# Allegro board DOEON_PCBv4.brd
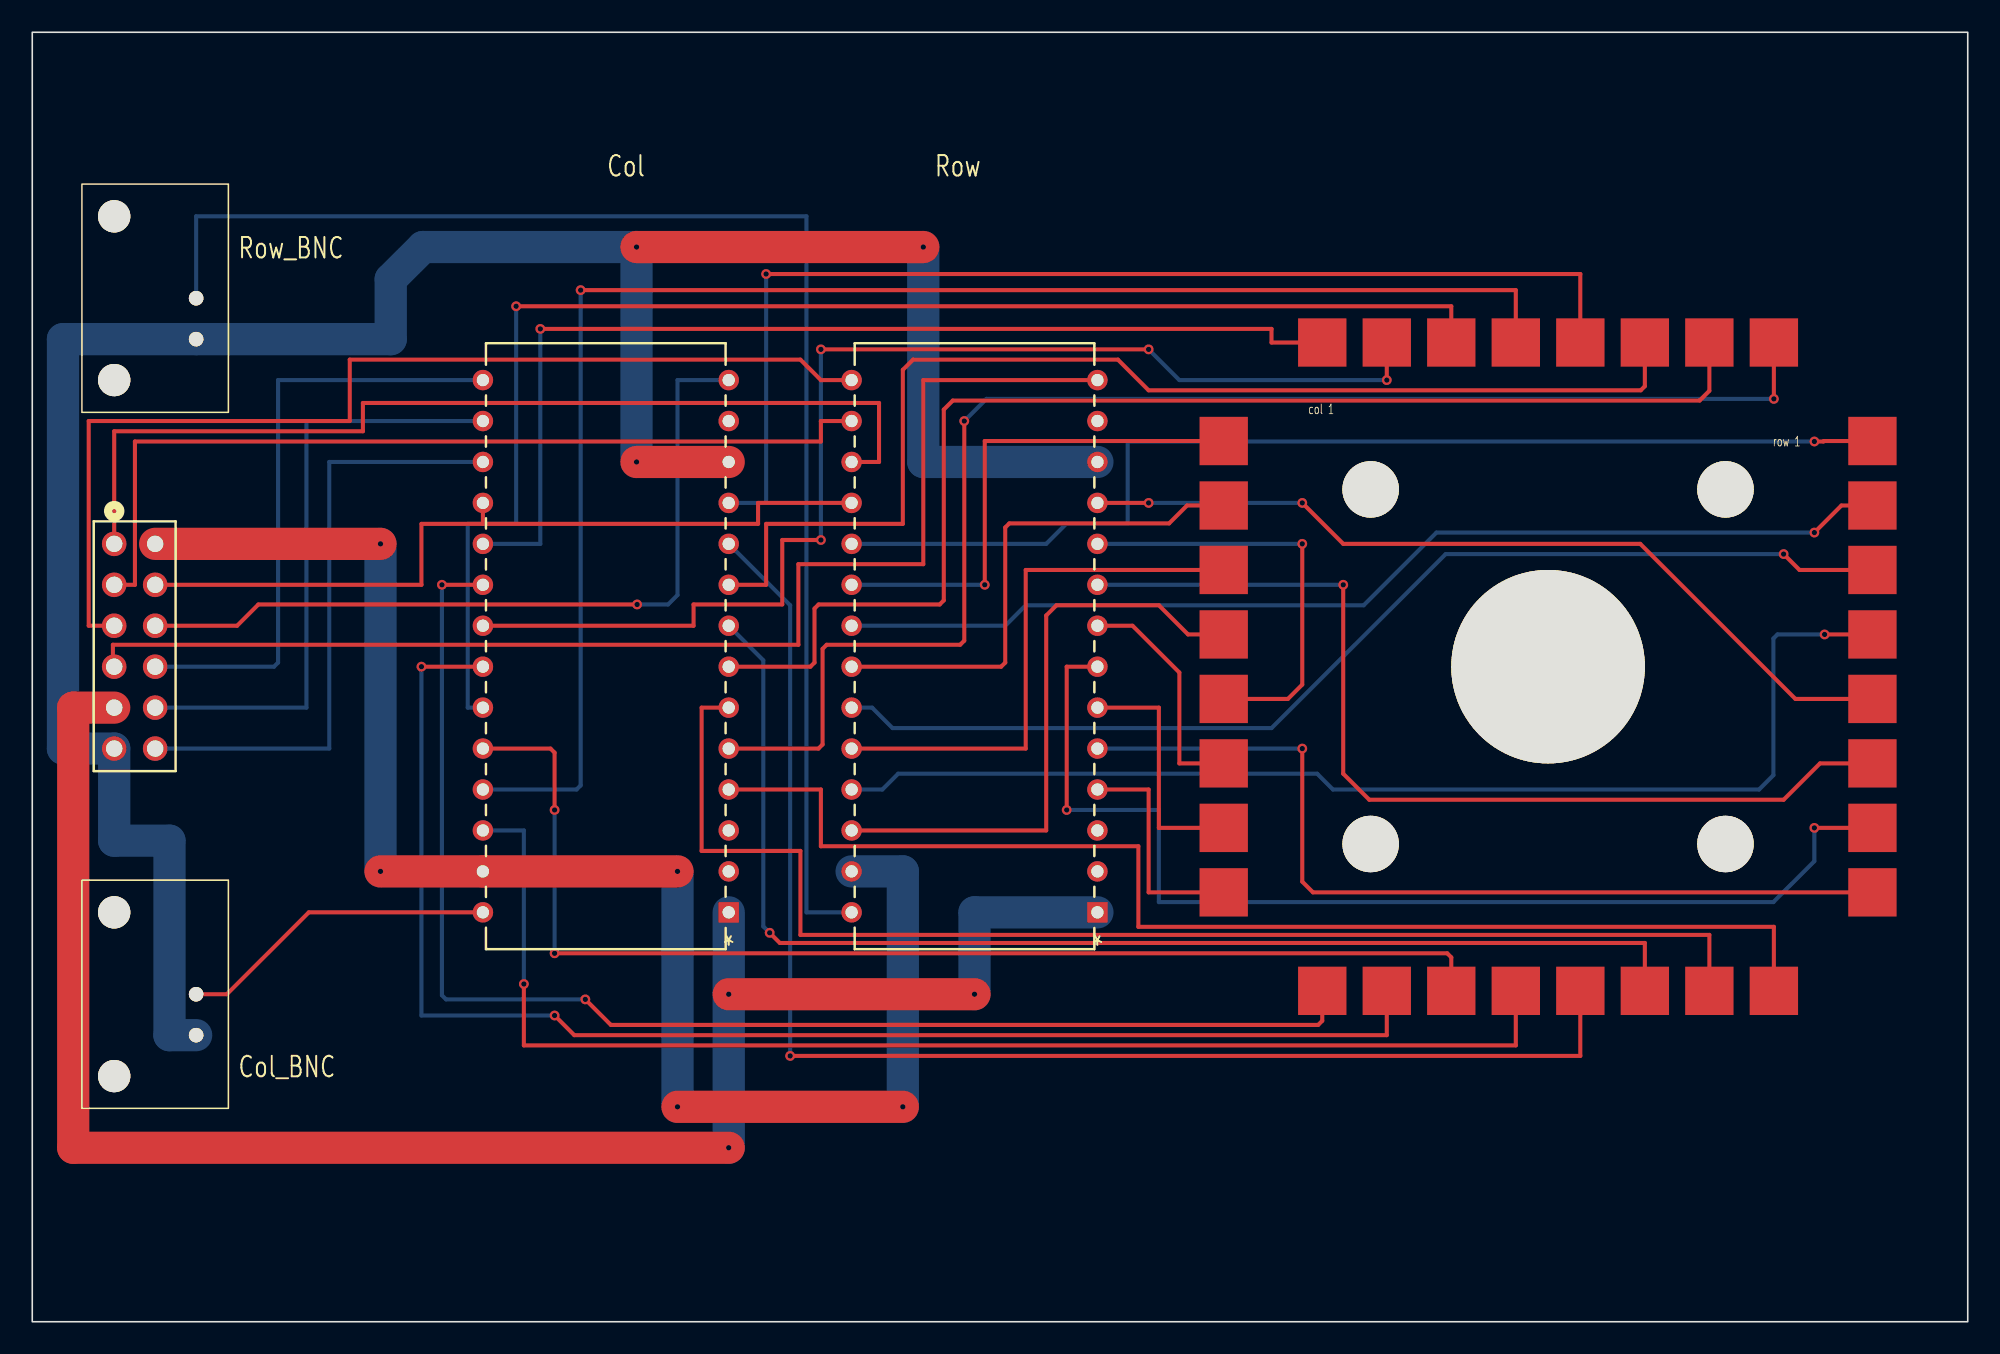
[diagram p0: board, top side]
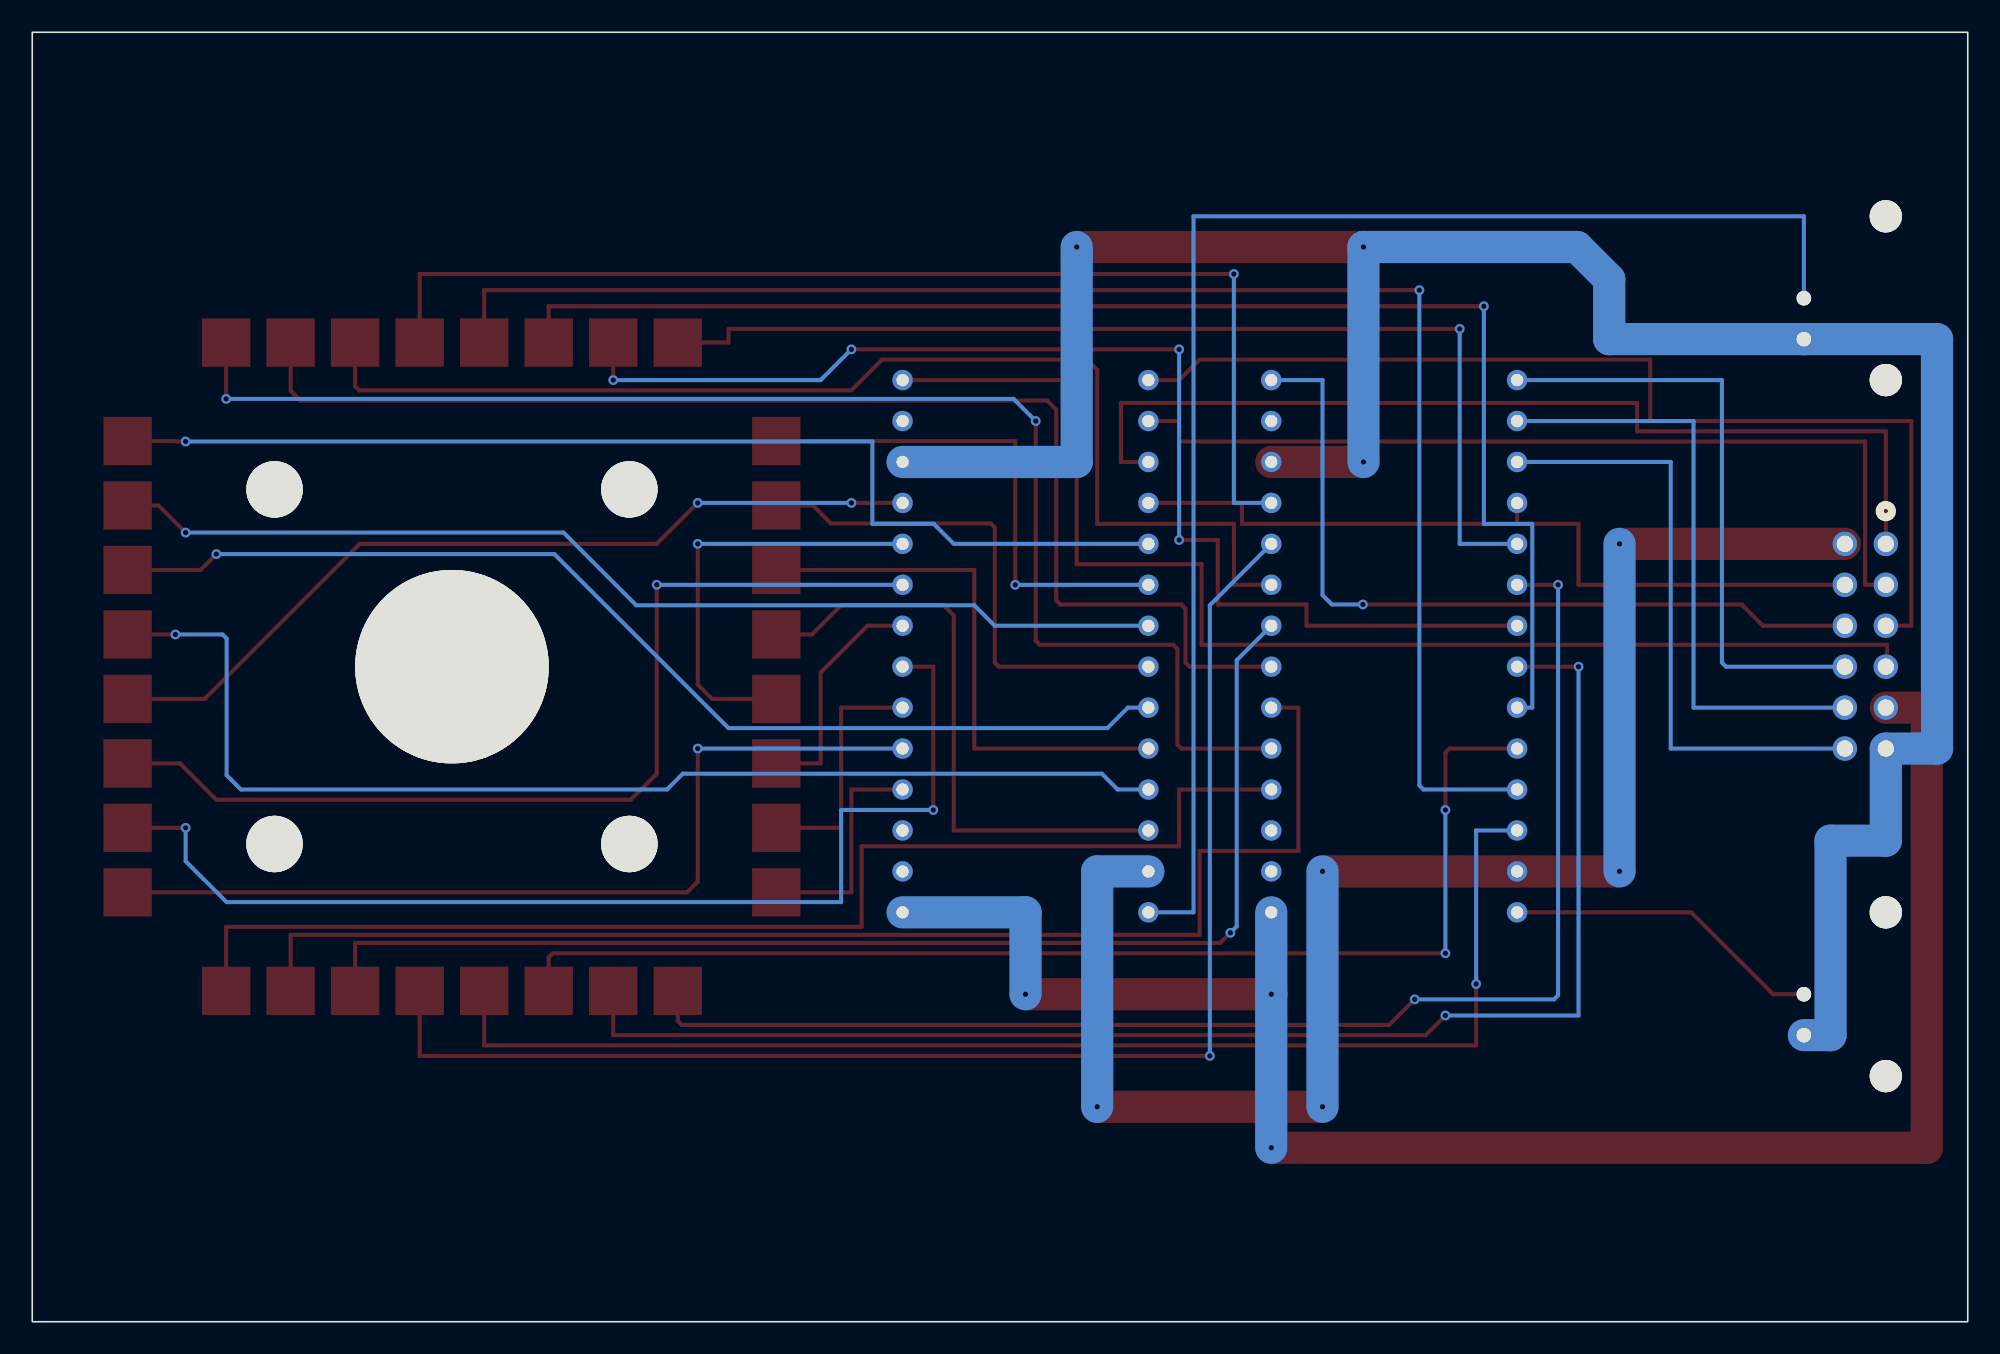
[diagram p1: board, bottom side, seen from below]

Outline 120 x 80 mm; copper layers: TOP, BOTTOM. Coordinates in mm from the lower left corner of the outline.
Outline path: rectangle 0,0 120,80

## Design rules (mm)
constraint set DEFAULT: min track width 0.254, pair gap 0.3

## Placement (name value [footprint] x y rotation side)
J1  67997-212HLF  [12PINS]  5.08 48.26 270 top
NOREF  -  []  0 80 0 top
NOREF#2  -  []  120 0 90 top
SAMPLE1  sample_holder  [SAMPLE_MOUNT]  93.98 40.64 0 top
U1  MAX396EPI  [21-0044B_28]  66.04 25.4 180 top
U2  MAX396EPI  [21-0044B_28]  43.18 25.4 180 top
VBI1  VBI211  [BNC_YB]  5.08 68.58 90 top
VBI2  VBI211  [BNC_YB]  5.08 25.4 90 top

## Library data of the parts
J1 = 67997-212HLF: User Part Number: PN; Tolerance: TOL
SAMPLE1 = sample_holder
U1 U2 = MAX396EPI: User Part Number: PN; Tolerance: TOL
VBI1 VBI2 = VBI211

## Footprints (pads in the part's own frame, mm; a bottom-side part is the same pattern mirrored in y, then rotated)
12PINS
  round 1.524 hole 1.016: A1(0,0) A2(2.54,0) A3(5.08,0) A4(7.62,0) A5(10.16,0) A6(12.7,0) B1(0,2.54) B2(2.54,2.54) B3(5.08,2.54) B4(7.62,2.54) B5(10.16,2.54) B6(12.7,2.54)
21-0044B_28
  rect 1.27x1.27 hole 0.762: 1(0,0)
  round 1.27 hole 0.762: 2(0,-2.54) 3(0,-5.08) 4(0,-7.62) 5(0,-10.16) 6(0,-12.7) 7(0,-15.24) 8(0,-17.78) 9(0,-20.32) 10(0,-22.86) 11(0,-25.4) 12(0,-27.94) 13(0,-30.48) 14(0,-33.02) 15(15.24,-33.02) 16(15.24,-30.48) 17(15.24,-27.94) 18(15.24,-25.4) 19(15.24,-22.86) 20(15.24,-20.32) 21(15.24,-17.78) 22(15.24,-15.24) 23(15.24,-12.7) 24(15.24,-10.16) 25(15.24,-7.62) 26(15.24,-5.08) 27(15.24,-2.54) 28(15.24,0)
BNC_YB
  round 0.9 hole 0.9: 1(-7.62,-5.08) 2(-5.08,-5.08)
  round 2 hole 2: 3(-10.16,0) 4(0,0)
SAMPLE_MOUNT
  rect 3x3 smd: 1(20.11,14) 2(-20.11,14) 3(20.11,10) 4(-20.11,10) 5(20.11,6) 6(-20.11,6) 7(20.11,2) 8(-20.11,2) 9(20.11,-2) 10(-20.11,-2) 11(20.11,-6) 12(-20.11,-6) 13(20.11,-10) 14(-20.11,-10) 15(20.11,-14) 16(-20.11,-14) 17(-14,20.11) 18(-14,-20.11) 19(-10,20.11) 20(-10,-20.11) 21(-6,20.11) 22(-6,-20.11) 23(-2,20.11) 24(-2,-20.11) 25(2,20.11) 26(2,-20.11) 27(6,20.11) 28(6,-20.11) 29(10,20.11) 30(10,-20.11) 31(14,20.11) 32(14,-20.11)
  round 3.5 hole 3.5: 33(-11,11) 34(11,11) 35(-11,-11) 36(11,-11)
  round 12 hole 12: 37(0,0)

## Nets
GND: J1.A6 U1.12 U2.12 VBI1.1 VBI2.1
COL_1: SAMPLE1.17 U2.19
COL_2: SAMPLE1.18 U2.20
COL_3: SAMPLE1.19 U2.21
COL_4: SAMPLE1.20 U2.22
COL_5: SAMPLE1.21 U2.23
COL_6: SAMPLE1.22 U2.24
COL_7: SAMPLE1.23 U2.25
COL_8: SAMPLE1.24 U2.26
COL_9: SAMPLE1.25 U2.11
COL_10: SAMPLE1.26 U2.10
COL_11: SAMPLE1.27 U2.9
COL_12: SAMPLE1.28 U2.8
COL_13: SAMPLE1.29 U2.7
COL_14: SAMPLE1.30 U2.6
COL_15: SAMPLE1.31 U2.5
COL_16: SAMPLE1.32 U2.4
COL_A0: J1.B6 U2.17
COL_A1: J1.B5 U2.16
COL_A2: J1.B4 U2.15
COL_A3: J1.B3 U2.14
EN: J1.B2 U1.18 U2.18
PULSE_IN: U1.28 VBI1.2(I_O)
PULSE_OUT: U2.28 VBI2.2(I_O)
ROW_1: SAMPLE1.1 U1.19
ROW_2: SAMPLE1.2 U1.20
ROW_3: SAMPLE1.3 U1.21
ROW_4: SAMPLE1.4 U1.22
ROW_5: SAMPLE1.5 U1.23
ROW_6: SAMPLE1.6 U1.24
ROW_7: SAMPLE1.7 U1.25
ROW_8: SAMPLE1.8 U1.26
ROW_9: SAMPLE1.9 U1.11
ROW_10: SAMPLE1.10 U1.10
ROW_11: SAMPLE1.11 U1.9
ROW_12: SAMPLE1.12 U1.8
ROW_13: SAMPLE1.13 U1.7
ROW_14: SAMPLE1.14 U1.6
ROW_15: SAMPLE1.15 U1.5
ROW_16: SAMPLE1.16 U1.4
ROW_A0: J1.A1 U1.17
ROW_A1: J1.A2 U1.16
ROW_A2: J1.A3 U1.15
ROW_A3: J1.A4 U1.14
V+: J1.A5 U1.1 U2.1
V-: J1.B1 U1.27(V-) U2.27(V-)

Pads without a net: SAMPLE1 33 34 35 36 37; U1 2 3 13; U2 2 3 13; VBI1 3 4; VBI2 3 4

## Via types
v1: diameter 0.61, hole 0.33, TOP to BOTTOM, 43 vias

## Routing (per net, layer and track width the routed paths; a pad name or vN(x,y) marks a point on that pad's centre or on a via; arc(x,y) is an arc through that point)
GND: length 152.5
  TOP w2: v1(37.47,53.34) U2.12 ; v1(55.24,66.67) v1(37.47,66.67)
  BOTTOM w2: VBI2.1 8.51,17.78 8.51,29.84 5.08,29.84 J1.A6 1.91,35.56 1.91,60.96 VBI1.1 22.23,60.96 22.23,64.67 24.23,66.67 v1(37.47,66.67) v1(37.47,53.34) ; U1.12 55.24,53.34 v1(55.24,66.67)
COL_1: length 66.2
  TOP w0.254: v1(31.5,61.59) 76.83,61.59 76.83,60.75 SAMPLE1.17
  BOTTOM w0.254: U2.19 31.5,48.26 v1(31.5,61.59)
COL_2: length 85.3
  TOP w0.254: SAMPLE1.18 79.98,18.67 79.73,18.41 35.88,18.41 v1(34.29,20) ; v1(25.4,45.72) U2.20
  BOTTOM w0.254: v1(25.4,45.72) 25.4,20.25 25.65,20 v1(34.29,20)
COL_3: length 76.3
  TOP w0.254: v1(83.98,58.42) SAMPLE1.19 ; v1(48.9,48.5) 46.5,48.5 46.5,44.5 41,44.5 41,43.18 U2.21 ; v1(48.9,60.33) v1(69.22,60.33)
  BOTTOM w0.254: v1(48.9,48.5) v1(48.9,60.33) ; v1(69.22,60.33) 71.12,58.42 v1(83.98,58.42)
COL_4: length 88.6
  TOP w0.254: SAMPLE1.20 83.98,17.78 33.6,17.78 v1(32.38,19) ; v1(24.13,40.64) U2.22
  BOTTOM w0.254: v1(24.13,40.64) 24.13,19 v1(32.38,19)
COL_5: length 89.1
  TOP w0.254: v1(30,63) 87.98,63 SAMPLE1.21
  BOTTOM w0.254: U2.23 27,38.1 27,49.5 30,49.5 v1(30,63)
COL_6: length 74.8
  TOP w0.254: U2.24 32.13,35.56 32.38,35.31 v1(32.38,31.75) ; SAMPLE1.22 87.98,22.61 87.73,22.86 v1(32.38,22.86)
  BOTTOM w0.254: v1(32.38,22.86) v1(32.38,31.75)
COL_7: length 98.1
  TOP w0.254: v1(34,64) 91.98,64 SAMPLE1.23
  BOTTOM w0.254: U2.25 33.75,33.02 34,33.27 v1(34,64)
COL_8: length 80.8
  TOP w0.254: SAMPLE1.24 91.98,17.14 30.48,17.14 v1(30.48,20.95)
  BOTTOM w0.254: v1(30.48,20.95) 30.48,30.48 U2.26
COL_9: length 71.2
  TOP w0.254: v1(45.5,65) 95.98,65 SAMPLE1.25
  BOTTOM w0.254: v1(45.5,65) 45.5,50.8 U2.11
COL_10: length 86.4
  TOP w0.254: v1(46.99,16.49) 95.98,16.49 SAMPLE1.26
  BOTTOM w0.254: U2.10 46.99,44.45 v1(46.99,16.49)
COL_11: length 74
  TOP w0.254: SAMPLE1.27 99.98,58.04 99.73,57.78 69.22,57.78 67.31,59.69 54.61,59.69 53.98,59.05 53.98,49.5 45.5,49.5 45.5,45.72 U2.9
COL_12: length 77.6
  TOP w0.254: v1(45.72,24.13) 46.35,23.5 99.98,23.5 SAMPLE1.28
  BOTTOM w0.254: v1(45.72,24.13) 45.32,24.53 45.32,41.04 U2.8
COL_13: length 79.8
  TOP w0.254: U2.7 48.25,40.64 48.5,40.89 48.5,44.25 48.75,44.5 56.26,44.5 56.52,44.75 56.52,56.59 57.07,57.15 103.38,57.15 103.98,57.75 SAMPLE1.29
COL_14: length 81.7
  TOP w0.254: SAMPLE1.30 103.98,24 47.62,24 47.62,29.21 41.5,29.21 41.5,38.1 U2.6
COL_15: length 88.7
  TOP w0.254: v1(57.78,55.88) 57.78,42.25 57.53,42 49.25,42 49,41.75 49,35.81 48.75,35.56 U2.5 ; v1(107.98,57.25) SAMPLE1.31
  BOTTOM w0.254: v1(107.98,57.25) 59.16,57.25 v1(57.78,55.88)
COL_16: length 77.3
  TOP w0.254: SAMPLE1.32 107.98,24.5 68.58,24.5 68.58,29.5 48.9,29.5 48.9,33.02 U2.4
COL_A0: length 38.1
  BOTTOM w0.254: J1.B6 18.41,35.56 18.41,53.34 U2.17
COL_A1: length 38.1
  BOTTOM w0.254: J1.B5 17,38.1 17,55.88 U2.16
COL_A2: length 38
  BOTTOM w0.254: U2.15 15.24,58.42 15.24,40.89 14.99,40.64 J1.B4
COL_A3: length 49.7
  TOP w0.254: J1.B3 12.7,43.18 14.02,44.5 v1(37.5,44.5)
  BOTTOM w0.254: U2.14 40.01,58.42 40.01,45.09 39.42,44.5 v1(37.5,44.5)
EN: length 49.6
  TOP w0.254: J1.B2 24.13,45.72 24.13,49.5 27.94,49.5 ; 27.94,49.5 U2.18 ; 27.94,49.5 45,49.5 45,50.8 U1.18
PULSE_IN: length 88.9
  BOTTOM w0.254: U1.28 48,25.4 48,68.58 10.16,68.58 VBI1.2
PULSE_OUT: length 19.9
  TOP w0.254: VBI2.2 12.06,20.32 17.14,25.4 U2.28
ROW_1: length 68.9
  TOP w0.254: v1(110.49,54.61) 111.05,54.61 111.08,54.64 SAMPLE1.1
  BOTTOM w0.254: U1.19 62.87,48.26 64.11,49.5 67.92,49.5 67.92,54.61 v1(110.49,54.61)
ROW_2: length 32
  TOP w0.254: v1(59.05,45.72) 59.05,54.64 SAMPLE1.2
  BOTTOM w0.254: U1.20 v1(59.05,45.72)
ROW_3: length 66.4
  TOP w0.254: v1(110.49,48.96) 112.17,50.64 SAMPLE1.3
  BOTTOM w0.254: v1(110.49,48.96) 87.06,48.96 82.55,44.45 61.6,44.45 60.33,43.18 U1.21
ROW_4: length 32.1
  TOP w0.254: SAMPLE1.4 71.59,50.64 70.48,49.53 60.58,49.53 60.33,49.28 60.33,40.89 60.07,40.64 U1.22
ROW_5: length 68.7
  TOP w0.254: v1(108.58,47.62) 109.57,46.64 SAMPLE1.5
  BOTTOM w0.254: U1.23 52.07,38.1 53.34,36.83 76.83,36.83 87.63,47.62 v1(108.58,47.62)
ROW_6: length 34.2
  TOP w0.254: U1.24 61.59,35.56 61.59,46.64 SAMPLE1.6
ROW_7: length 73.1
  TOP w0.254: SAMPLE1.7 v1(111.12,42.64)
  BOTTOM w0.254: v1(111.12,42.64) 108.2,42.64 107.95,42.39 107.95,33.91 107.06,33.02 80.65,33.02 79.67,34 53.69,34 52.7,33.02 U1.25
ROW_8: length 37.4
  TOP w0.254: U1.26 62.87,30.48 62.87,43.81 63.5,44.45 69.85,44.45 71.66,42.64 SAMPLE1.8
ROW_9: length 53.1
  TOP w0.254: SAMPLE1.9 109.31,38.64 99.69,48.26 81.28,48.26 v1(78.74,50.8) ; U1.11 v1(69.22,50.8) 69.25,50.8
  BOTTOM w0.254: v1(78.74,50.8) v1(69.22,50.8)
ROW_10: length 26.7
  TOP w0.254: SAMPLE1.10 77.85,38.64 78.74,39.53 v1(78.74,48.26)
  BOTTOM w0.254: v1(78.74,48.26) U1.10
ROW_11: length 61.4
  TOP w0.254: SAMPLE1.11 110.84,34.64 108.58,32.38 82.89,32.38 81.28,34 v1(81.28,45.72)
  BOTTOM w0.254: U1.9 v1(81.28,45.72)
ROW_12: length 14.7
  TOP w0.254: SAMPLE1.12 71.12,34.64 71.12,40.28 68.22,43.18 U1.8
ROW_13: length 69.6
  TOP w0.254: v1(110.49,30.64) SAMPLE1.13 ; v1(64.14,31.75) 64.14,40.64 U1.7
  BOTTOM w0.254: v1(64.14,31.75) 69.85,31.75 69.85,26.04 107.95,26.04 110.49,28.57 v1(110.49,30.64)
ROW_14: length 15.3
  TOP w0.254: SAMPLE1.14 69.85,30.64 69.85,38.1 U1.6
ROW_15: length 56.6
  TOP w0.254: v1(78.74,35.56) 78.74,27.3 79.41,26.64 SAMPLE1.15
  BOTTOM w0.254: U1.5 v1(78.74,35.56)
ROW_16: length 14.2
  TOP w0.254: SAMPLE1.16 69.22,26.64 69.22,33.02 U1.4
ROW_A0: length 61.5
  TOP w0.254: U1.17 52.5,53.34 52.5,57 20.5,57 20.5,55.24 5.08,55.24 J1.A1
ROW_A1: length 55.9
  TOP w0.254: U1.16 48.9,55.88 48.9,54.61 6.37,54.61 6.37,45.72 J1.A2
ROW_A2: length 65.9
  TOP w0.254: U1.15 48.9,58.42 47.62,59.69 19.68,59.69 19.68,55.88 3.5,55.88 3.5,43.18 J1.A3
ROW_A3: length 78.9
  TOP w0.254: J1.A4 5,40.64 5,42 47.5,42 47.5,47 55.24,47 55.24,58.42 U1.14
V+: length 113
  TOP w2: v1(43.18,10.79) 2.54,10.79 2.54,38.1 J1.A5 ; v1(43.18,20.32) v1(58.42,20.32)
  BOTTOM w2: U1.1 58.42,25.4 v1(58.42,20.32) ; v1(43.18,10.79) v1(43.18,20.32) U2.1
V-: length 99.1
  TOP w2: v1(40.01,27.94) U2.27 v1(21.59,27.94) ; v1(53.98,13.34) v1(40.01,13.34) ; J1.B1 v1(21.59,48.26)
  BOTTOM w2: U1.27 53.98,27.94 v1(53.98,13.34) ; v1(40.01,27.94) v1(40.01,13.34) ; v1(21.59,27.94) v1(21.59,48.26)

## Text on the board
Ref Des/Silkscreen Top: Row_BNC | Col_BNC | Col | Row
DIMENSION: FIGURE | FINISHED_SIZE | 0.3302 | 0.762 | 0.8999 | 1.016 | 2.0 | 3.5001 | 12.0 | DRILL CHART: TOP to BOTTOM | ALL UNITS ARE IN MILLIMETERS | PLATED | QTY | 45 | 56 | 4 | 12 | 1
